# Altium PCB QSTL_25P_ZIF_ZIF.PcbDoc
Units mm, origin at the board's own origin, x right, y up, seen from the top; angles counter-clockwise.
Board outline 30 x 30 mm, 4 copper layers (Top Layer, Layer 1, Layer 2, Bottom Layer), stack 0.603 mm thick; 8 components, 54 nets, 116 pads, 331 vias.
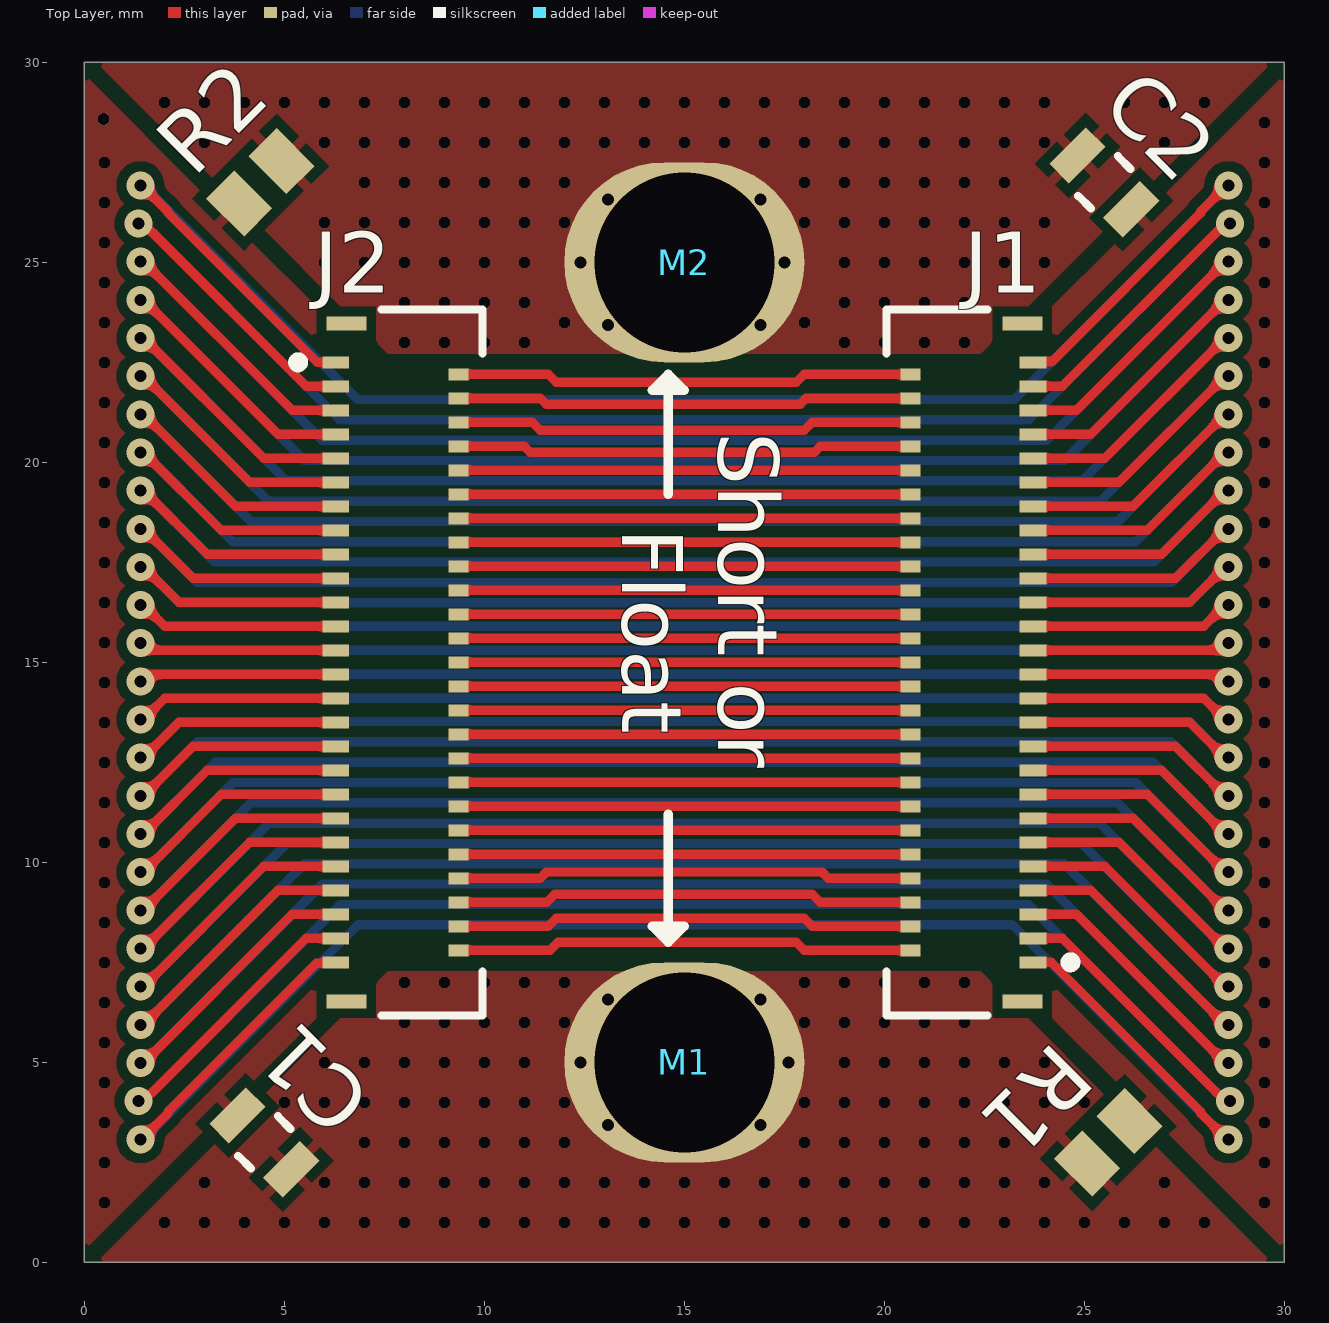
[diagram p0: Top Layer view]
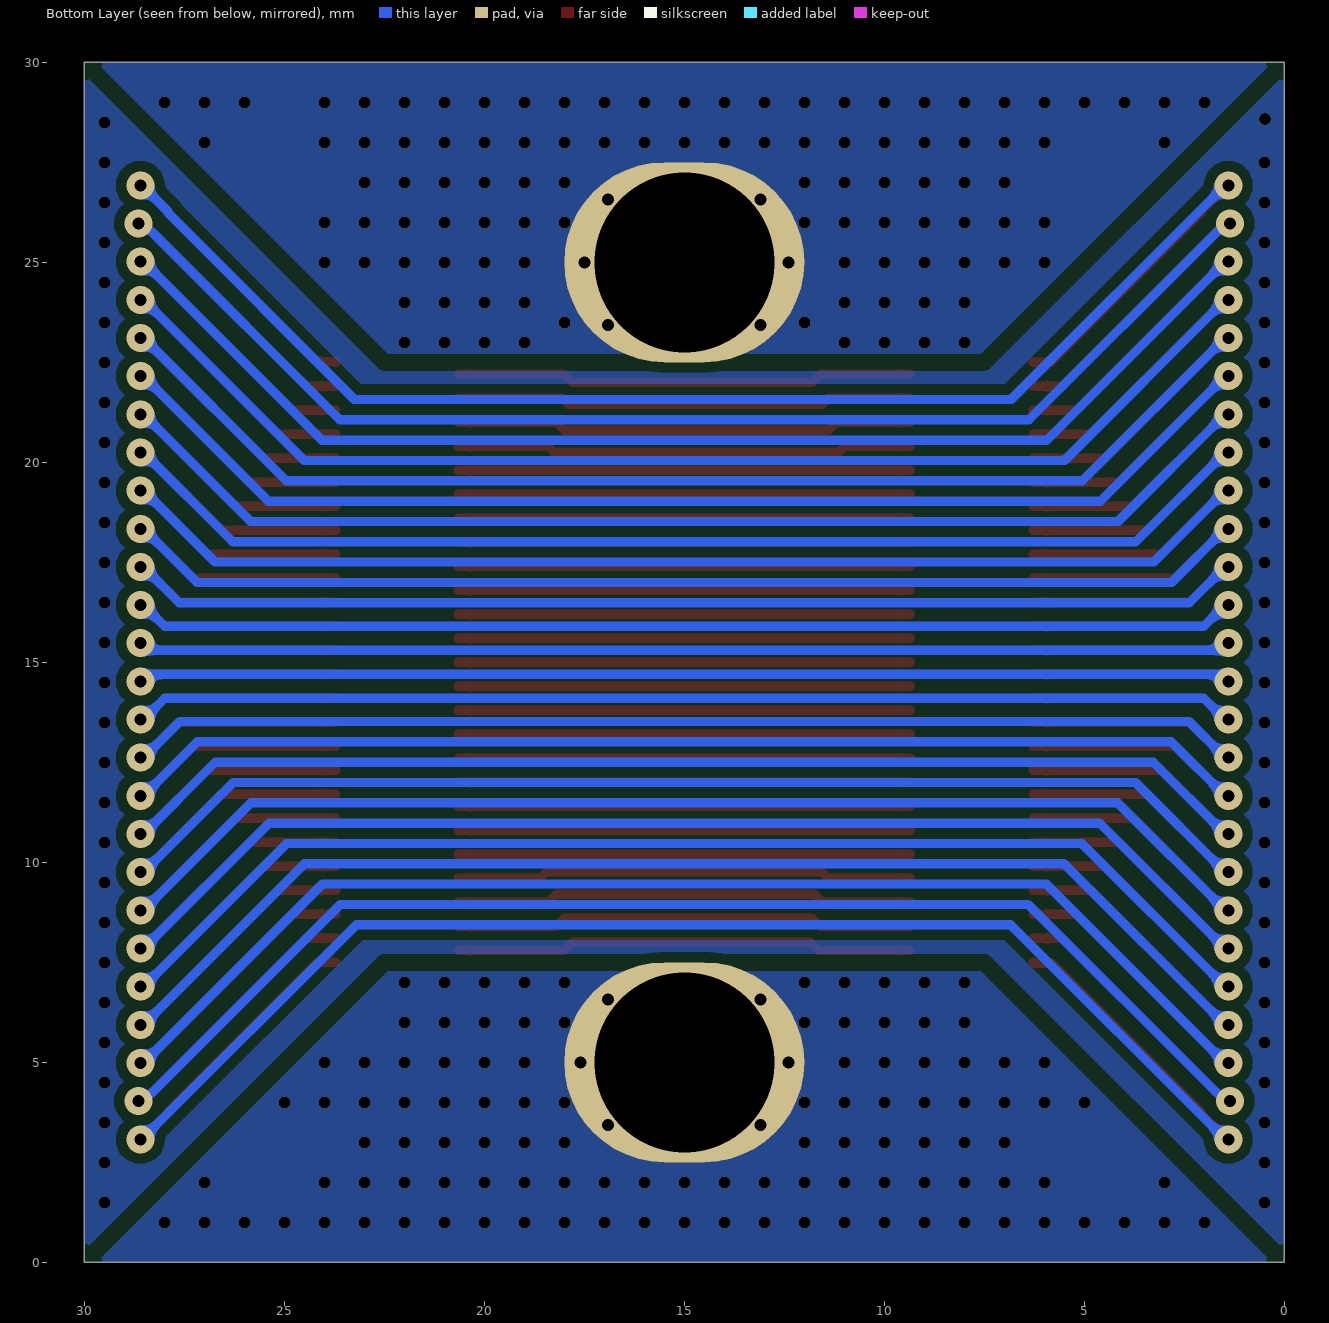
[diagram p1: Bottom Layer view, seen from below]
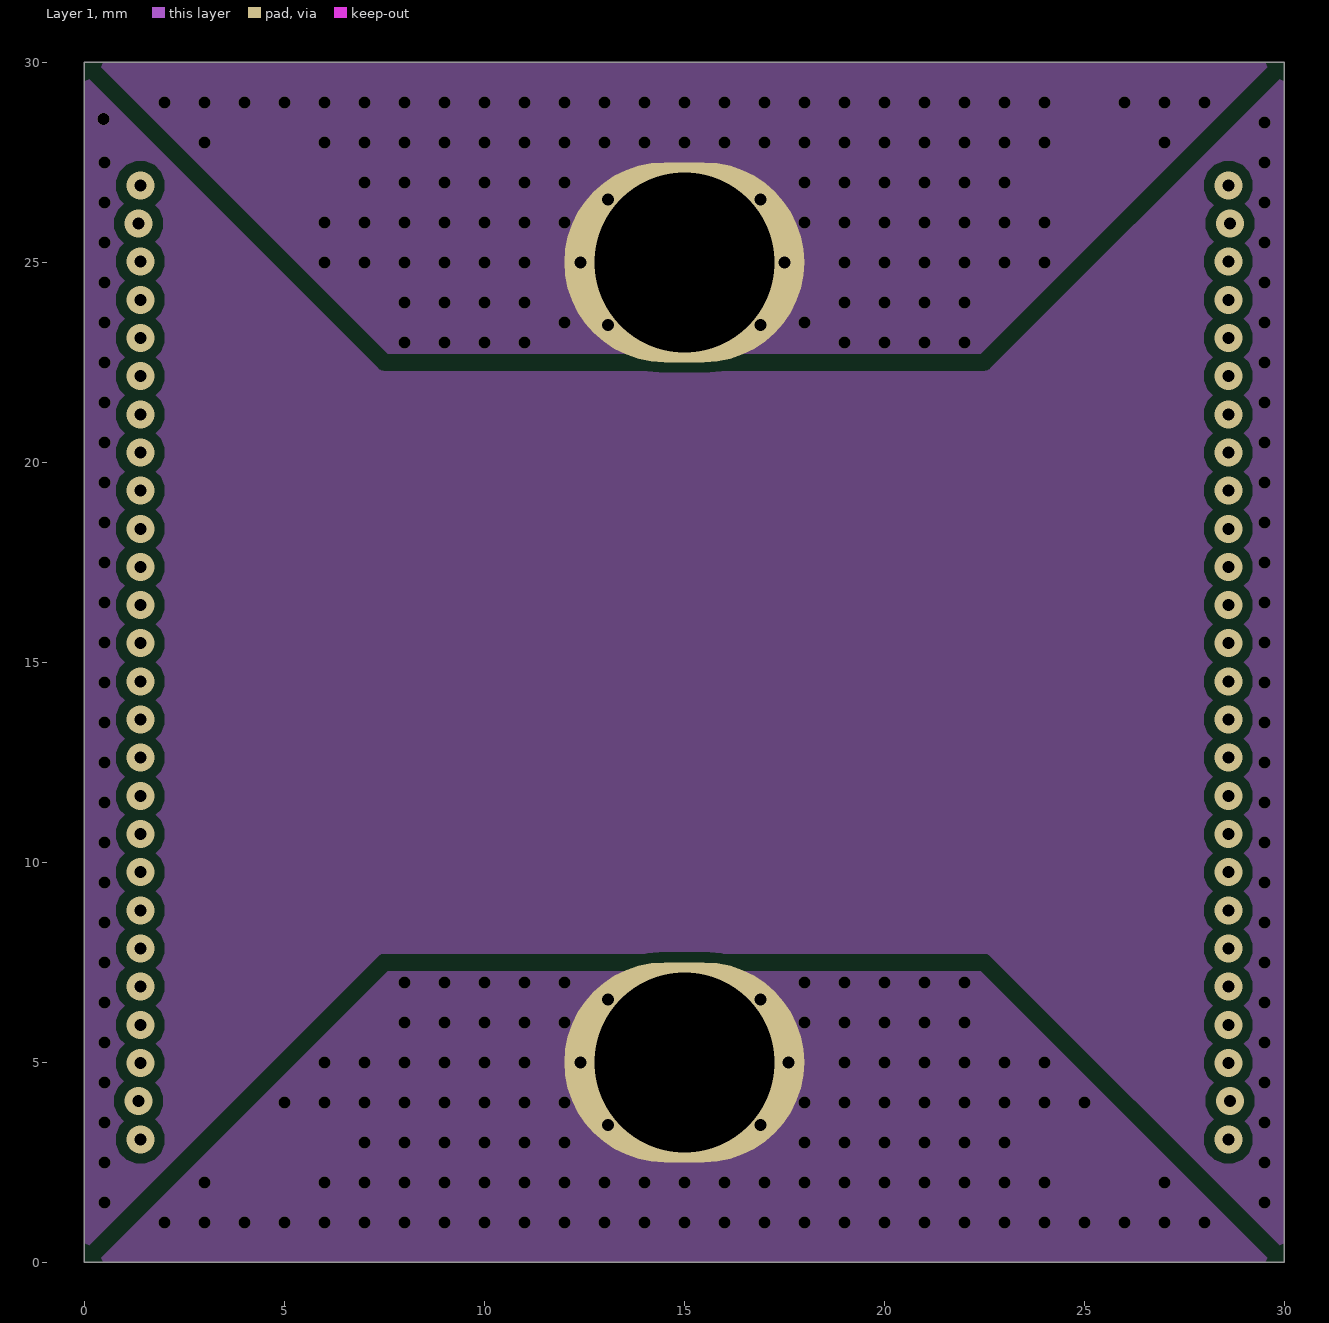
[diagram p2: Layer 1]
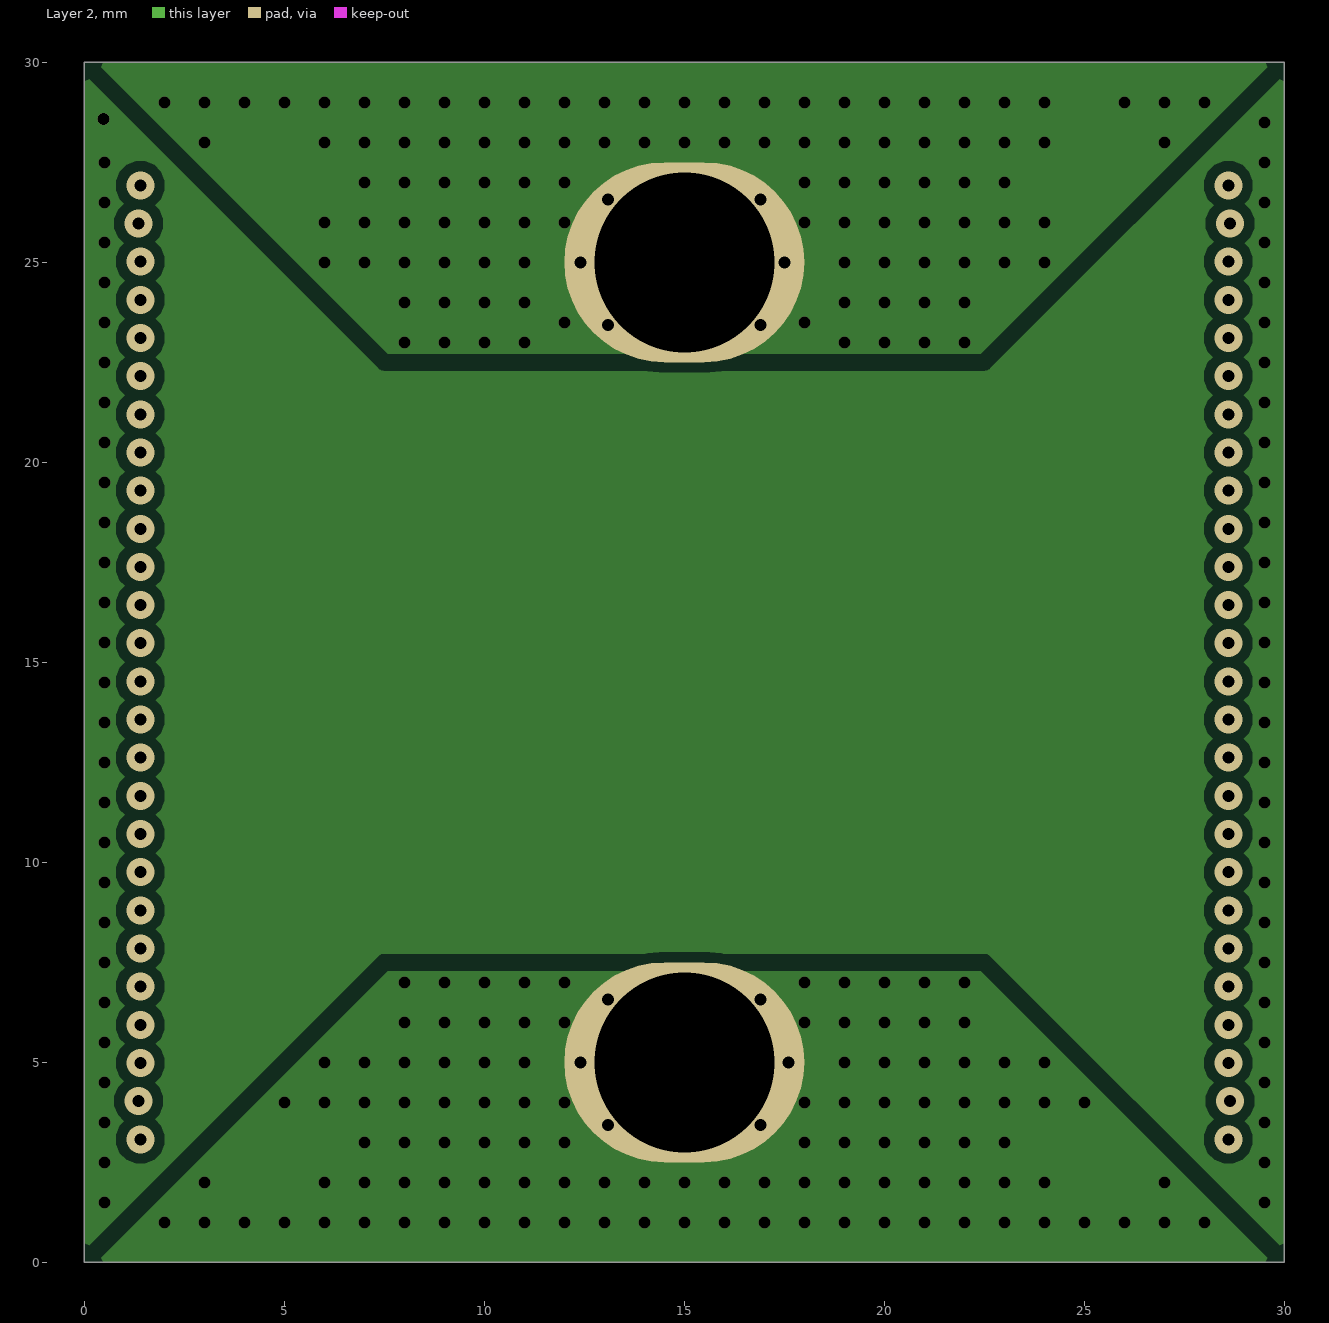
[diagram p3: Layer 2]

## Layer stack, top to bottom
Top Solder: solder mask 0.0102, Solder Resist, Dk 3.5
Top Layer: signal copper 0.0356
Dielectric 2: prepreg 0.0711, PP-006, Dk 4.1
Layer 1: signal copper 0.035
Dielectric 1: dielectric 0.32, FR-4, Dk 4.8
Layer 2: signal copper 0.035
Dielectric 3: prepreg 0.0711, PP-006, Dk 4.1
Bottom Layer: signal copper 0.0356
Bottom Solder: solder mask 0.0102, Solder Resist, Dk 3.5

## Board outline
0,0 0,30 30,30 30,0

## Design rules (kind name [scope] priority, off if disabled: settings)
Clearance [All] p1: gap=0.254 ignorepadtopadclearanceinfootprint=FALSE except(0.2: Arc-Arc Arc-Track Track-Track)
ComponentClearance [All] p1: gap=0.01 collisioncheckmode=3 verticalgap=0.254 showdistances=FALSE
PolygonConnect [All] p1: connectstyle=Relief reliefconductorwidth=0.254 reliefentries=4 polygonreliefangle="90 Angle" airgapwidth=0.254
RoutingVias [All] p1: holewidth=0.3 width=0.7 viastyle="Through Hole" minholewidth=0.3 minwidth=0.3 maxholewidth=0.3 maxwidth=1
SolderMaskExpansion [All] p1: expansion=0.102 istentingtop=FALSE
SupplyNets "Schematic Supply Nets" [InNet('GND')] p1: voltage=0.000
Width [All] p1: maxlimit=0.35 minlimit=0.156 preferedwidth=0.156 minimp=50.000000 maximp=50.000000 favimp=50.000000
29 further rules are at their usual default settings.

## Components (designator, comment, footprint, x,y, rotation, side; value= is the part's Value field where it differs from the comment)
C1 "Murata 0805" FP-GRM21B-0_15-MFG 4.5,3 r135 top
C2 "Murata 0805" FP-GRM21B-0_15-MFG 25.5,27 r315 top
J1 "5025985193" FP-5025985193-MFG 22,15 r90 top locked
J2 "5025985193" FP-5025985193-MFG 8,15 r270 top locked
M1 "M3 Connector" M3 15,5 r0 top locked
M2 "M3 Connector" M3 15,25 r0 top locked
R1 "Panasonic 0805" RESC2013X60X40LL20T25 25.6,3 r45 top
R2 "Panasonic 0805" RESC2013X60X40LL20T25 4.4,27 r225 top

## Footprints (in the part's own frame and the unit in brackets; to place one, negate y for a bottom-side part, rotate by r counter-clockwise, add the part's x,y. Pads: shape width x height; smd on the part's side, far side on the other; paste and mask are expansions set on the pad)
FP-5025985193-MFG [mm]
  rect 0.3x0.67 smd paste+0 mask+0: 1(-7.5,-1.715) 3(-6.9,-1.715) 5(-6.3,-1.715) 7(-5.7,-1.715) 9(-5.1,-1.715) 11(-4.5,-1.715) 13(-3.9,-1.715) 15(-3.3,-1.715) 17(-2.7,-1.715) 19(-2.1,-1.715) 21(-1.5,-1.715) 23(-0.9,-1.715) 25(-0.3,-1.715) 27(0.3,-1.715) 29(0.9,-1.715) 31(1.5,-1.715) 33(2.1,-1.715) 35(2.7,-1.715) 37(3.3,-1.715) 39(3.9,-1.715) 41(4.5,-1.715) 43(5.1,-1.715) 45(5.7,-1.715) 47(6.3,-1.715) 49(6.9,-1.715) 51(7.5,-1.715)
  rect 0.3x0.5 smd paste+0 mask+0: 2(-7.2,1.35) 4(-6.6,1.35) 6(-6,1.35) 8(-5.4,1.35) 10(-4.8,1.35) 12(-4.2,1.35) 14(-3.6,1.35) 16(-3,1.35) 18(-2.4,1.35) 20(-1.8,1.35) 22(-1.2,1.35) 24(-0.6,1.35) 26(0,1.35) 28(0.6,1.35) 30(1.2,1.35) 32(1.8,1.35) 34(2.4,1.35) 36(3,1.35) 38(3.6,1.35) 40(4.2,1.35) 42(4.8,1.35) 44(5.4,1.35) 46(6,1.35) 48(6.6,1.35) 50(7.2,1.35)
  rect 0.35x1 smd paste+0 mask+0: 52(-8.475,-1.45) 53(8.475,-1.45)
  silkscreen extent -8.83,-2.78 8.82,1.95
FP-GRM21B-0_15-MFG [mm]
  rect 0.7x1.3 smd paste+0 mask+0: 1(-0.95,0) 2(0.95,0)
  silkscreen extent -0.23,-0.7 0.23,0.7, body extent -1.4,-0.8 1.4,0.8, height 0.25
M3 [mm]
  oval 6x5 hole 4.5: M3(0,0)
RESC2013X60X40LL20T25 [mm] "Chip Resistor, 2-Leads, Body 2.00x1.25mm, IPC High Density"
  rect 1x1.35 smd: 1(-0.75,0) 2(0.75,0)
  body extent -1.1,-0.72 1.1,0.72, height 0.6

## Part data
C1 C2: library part CMP-2000-07555-2, "Chip Multilayer Ceramic Capacitors for General Purpose, 0805, 10uF, X7R, 15%, 10%, 10V", Capacitance=10uF, Case Code (Imperial)=0805, Case Code (Metric)=2012, Dielectric=X7R, Max Operating Temperature=125°C, Min Operating Temperature=-55°C, Package Quantity=3000, Tolerance=10%, Voltage Rating=10V, Case/Package=0805, Depth=1.25mm, Height=1.25mm, Length=2mm, Mount="Surface Mount", Packaging="Tape and Reel", REACH SVHC="No SVHC", Termination=SMD/SMT, Thickness=0.055inch, Voltage Rating (DC)=10V, Weight=0.000335oz, Width=1.25mm
J1 J2: library part CMP-1241-00093-2, "CONN FPC 51POS 0.30MM R/A", Ambient Temperature Range High=+105°C, Ambient Temperature Range Low=-40°C, Current Rating=0.3A, Manufacturer=Molex, Package=0, Temperature="-40°C to +105°C", Voltage Rating=50V, Automotive=No, Category=Conn, Ciiva Ids=8412513, ComponentLink2Description=Datasheet, ComponentLink2URL=https://www.molex.com/webdocs/datasheets/pdf/en-us/5025985193_FFC_FPC_CONNECTORS.pdf, Conn Gender=Female, Conn Orientation="Right Angle", Contact Material=Gold,Nickel, Device Class L1=Connectors, Device Class L2="FFC / FPC", Device Class L3=unset, Digikey Description="CONN FPC 51POS 0.30MM R/A", Footprint Url=https://www.molex.com/pdm_docs/sd/5025985193_sd.pdf, Height=1.83mm, Import Ts=1521860080, Is Female=yes, Lead Free=Yes, Manufacturer Part Number=5025985193, Mouser Description="FFC & FPC Connectors 0.3 FPC BackFlip Hsg RA SMT 51Ckt", Number of Contacts=51, Octopart=https://octopart.com/502598-5193-molex-33127991, Pitch=0.6mm, Release Date=1411372322, RoHS=TRUE, Temperature Range High=+105°C, Temperature Range Low=-40°C
M1 M2: library part M3
R1 R2: library part CMP-2001-00613-1, Manufacturer=Panasonic, Part Number=ERA6AEB222V

## Via types
v1: diameter 0.3, hole 0.3, Top Layer to Bottom Layer, 124 vias
v2: diameter 0.3, hole 0.3, Top Layer to Bottom Layer, tented top, 89 vias
v3: diameter 0.3, hole 0.3, Top Layer to Bottom Layer, tented both sides, 66 vias
v4: diameter 0.7, hole 0.3, Top Layer to Bottom Layer, tented both sides, 52 vias

## Nets (pads, with @x,y where several pads share a name; then routed paths per layer and width w, separated by ;. In a path a pad name is that pad's centre, name@x,y a point inside that pad or via, vN(x,y) a via of type N, cw(c..) or ccw(c..) an arc to the next point about the centre after c; other vN are vias at no path point)
GND: C1.2 C2.2 R1.2 R2.2
  other v3: 0.5,1.5 29.5,1.5 0.5,2.5 29.5,2.5 0.5,3.5 29.5,3.5 0.5,4.5 29.5,4.5 0.5,5.5 29.5,5.5 0.5,6.5 29.5,6.5 0.5,7.5 29.5,7.5 0.5,8.5 29.5,8.5 0.5,9.5 29.5,9.5 0.5,10.5 29.5,10.5 0.5,11.5 29.5,11.5 0.5,12.5 29.5,12.5 0.5,13.5 29.5,13.5 0.5,14.5 29.5,14.5 0.5,15.5 29.5,15.5 0.5,16.5 29.5,16.5 0.5,17.5 29.5,17.5 0.5,18.5 29.5,18.5 0.5,19.5 29.5,19.5 0.5,20.5 29.5,20.5 0.5,21.5 29.5,21.5 0.5,22.5 29.5,22.5 0.5,23.5 29.5,23.5 0.5,24.5 29.5,24.5 0.5,25.5 29.5,25.5 0.5,26.5 29.5,26.5 0.5,27.5 29.5,27.5 29.5,28.5 0.48,28.587
NetC1_1: C1.1 M1.M3 R1.1
  other v1: 8,1 9,1 10,1 11,1 12,1 13,1 14,1 15,1 16,1 17,1 18,1 19,1 20,1 21,1 22,1 8,2 9,2 10,2 11,2 12,2 13,2 14,2 15,2 16,2 17,2 18,2 19,2 20,2 21,2 22,2 8,3 9,3 10,3 11,3 12,3 18,3 19,3 20,3 21,3 22,3 13.094,3.436 16.906,3.436 8,4 9,4 10,4 11,4 12,4 18,4 19,4 20,4 21,4 22,4 8,5 9,5 10,5 11,5 19,5 20,5 21,5 22,5 12,6 18,6 12,7 18,7
  other v2: 2,1 3,1 4,1 5,1 6,1 7,1 23,1 24,1 25,1 26,1 27,1 28,1 3,2 6,2 7,2 23,2 24,2 27,2 7,3 23,3 5,4 6,4 7,4 23,4 24,4 25,4 6,5 7,5 23,5 24,5 8,6 9,6 10,6 11,6 19,6 20,6 21,6 22,6 8,7 9,7 10,7 11,7 19,7 20,7 21,7 22,7
  other v3: 12.4,5 17.6,5 13.094,6.564 16.906,6.564
NetC2_1: C2.1 M2.M3 R2.1
  other v1: 12,23.5 18,23.5 8,25 9,25 10,25 11,25 19,25 20,25 21,25 22,25 8,26 9,26 10,26 11,26 12,26 18,26 19,26 20,26 21,26 22,26 8,27 9,27 10,27 11,27 12,27 18,27 19,27 20,27 21,27 22,27 8,28 9,28 10,28 11,28 12,28 13,28 14,28 15,28 16,28 17,28 18,28 19,28 20,28 21,28 22,28 8,29 9,29 10,29 11,29 12,29 13,29 14,29 15,29 16,29 17,29 18,29 19,29 20,29 21,29 22,29
  other v2: 8,23 9,23 10,23 11,23 19,23 20,23 21,23 22,23 8,24 9,24 10,24 11,24 19,24 20,24 21,24 22,24 6,25 7,25 23,25 24,25 6,26 7,26 23,26 24,26 7,27 23,27 3,28 6,28 7,28 23,28 24,28 27,28 2,29 3,29 4,29 5,29 6,29 7,29 23,29 24,29 26,29 27,29 28,29
  other v3: 13.094,23.436 16.906,23.436 12.4,25 17.5,25 13.094,26.564 16.906,26.564
NetJ1_1: J1.1 J2.51 | length 45
  Top Layer w0.232: v4(1.4,3.075) 1.437,3.075 2.089,3.727 2.089,3.764 5.802,7.477 6.262,7.477 J2.51 ; J1.1 24.175,7.5 27.911,3.764 27.911,3.727 28.563,3.075 v4(28.6,3.075)
  Bottom Layer w0.232: v4@1.48,3.075 6.845,8.44 23.198,8.44 28.563,3.075 v4(28.6,3.075)
NetJ1_2: J1.2 J2.50 | length 11.5
  Top Layer w0.232: J2.50 11.642,7.8 11.842,8 17.8,8 18,7.8 J1.2
NetJ1_3: J1.3 J2.49 | length 44.6
  Top Layer w0.232: v4(1.358,4.03) 1.479,4.03 1.701,4.252 1.703,4.252 5.551,8.1 J2.49 ; J1.3 24.449,8.1 28.297,4.252 28.299,4.252 28.521,4.03 v4(28.642,4.03)
  Bottom Layer w0.232: v4(1.358,4.03) 1.479,4.03 1.701,4.252 1.703,4.252 6.399,8.948 23.601,8.948 28.297,4.252 28.299,4.252 28.521,4.03 v4(28.642,4.03)
NetJ1_4: J1.4 J2.48 | length 11.5
  Top Layer w0.232: J2.48 11.6,8.4 11.8,8.6 18,8.6 18.2,8.4 J1.4
NetJ1_5: J1.5 J2.47 | length 43.7
  Top Layer w0.232: v4(1.4,4.983) 1.48,4.983 5.197,8.7 J2.47 ; J1.5 24.803,8.7 28.52,4.983 v4(28.6,4.983)
  Bottom Layer w0.232: v4@1.48,4.983 5.953,9.456 24.047,9.456 28.52,4.983 v4(28.6,4.983)
NetJ1_6: J1.6 J2.46 | length 11.5
  Top Layer w0.232: J2.46 11.558,9 11.758,9.2 18.2,9.2 18.4,9 J1.6
NetJ1_7: J1.7 J2.45 | length 43
  Top Layer w0.232: v4(1.4,5.937) 1.48,5.937 4.843,9.3 J2.45 ; J1.7 25.157,9.3 28.52,5.937 v4(28.6,5.937)
  Bottom Layer w0.232: v4@1.48,5.937 5.507,9.964 24.493,9.964 28.52,5.937 v4(28.6,5.937)
NetJ1_8: J1.8 J2.44 | length 11.4
  Top Layer w0.232: J2.44 9.981,9.6 11.4,9.6 11.557,9.757 18.443,9.757 18.6,9.6 J1.8
NetJ1_9: J1.9 J2.43 | length 42.3
  Top Layer w0.232: v4(1.4,6.891) 1.48,6.891 4.489,9.9 J2.43 ; J1.9 25.511,9.9 28.52,6.891 v4(28.6,6.891)
  Bottom Layer w0.232: v4@1.48,6.891 5.061,10.472 24.939,10.472 28.52,6.891 v4(28.6,6.891)
NetJ1_10: J1.10 J2.42 | length 11.3
  Top Layer w0.232: J2.42 J1.10
NetJ1_11: J1.11 J2.41 | length 41.7
  Top Layer w0.232: v4(1.4,7.845) 1.48,7.845 4.135,10.5 J2.41 ; J1.11 25.865,10.5 28.52,7.845 v4(28.6,7.845)
  Bottom Layer w0.232: v4@1.48,7.845 4.615,10.98 25.385,10.98 28.52,7.845 v4(28.6,7.845)
NetJ1_12: J1.12 J2.40 | length 11.3
  Top Layer w0.232: J2.40 J1.12
NetJ1_13: J1.13 J2.39 | length 41
  Top Layer w0.232: v4(1.4,8.799) 1.48,8.799 3.781,11.1 J2.39 ; J1.13 26.219,11.1 28.52,8.799 v4(28.6,8.799)
  Bottom Layer w0.232: v4@1.48,8.799 4.169,11.488 25.831,11.488 28.52,8.799 v4(28.6,8.799)
NetJ1_14: J1.14 J2.38 | length 11.3
  Top Layer w0.232: J2.38 J1.14
NetJ1_15: J1.15 J2.37 | length 40.4
  Top Layer w0.232: v4(1.4,9.753) 1.48,9.753 3.427,11.7 J2.37 ; J1.15 26.573,11.7 28.52,9.753 v4(28.6,9.753)
  Bottom Layer w0.232: v4@1.48,9.753 3.723,11.996 26.277,11.996 28.52,9.753 v4(28.6,9.753)
NetJ1_16: J1.16 J2.36 | length 11.3
  Top Layer w0.232: J2.36 J1.16
NetJ1_17: J1.17 J2.35 | length 39.7
  Top Layer w0.232: v4(1.4,10.707) 1.48,10.707 3.073,12.3 J2.35 ; J1.17 26.927,12.3 28.52,10.707 v4(28.6,10.707)
  Bottom Layer w0.232: v4@1.48,10.707 3.277,12.504 26.723,12.504 28.52,10.707 v4(28.6,10.707)
NetJ1_18: J1.18 J2.34 | length 11.3
  Top Layer w0.232: J2.34 J1.18
NetJ1_19: J1.19 J2.33 | length 39
  Top Layer w0.232: v4(1.4,11.661) 1.48,11.661 2.719,12.9 J2.33 ; J1.19 27.281,12.9 28.52,11.661 v4(28.6,11.661)
  Bottom Layer w0.232: v4@1.48,11.661 2.831,13.012 27.169,13.012 28.52,11.661 v4(28.6,11.661)
NetJ1_20: J1.20 J2.32 | length 11.3
  Top Layer w0.232: J2.32 J1.20
NetJ1_21: J1.21 J2.31 | length 38.4
  Top Layer w0.232: v4(1.4,12.615) 1.48,12.615 2.365,13.5 J2.31 ; J1.21 27.635,13.5 28.52,12.615 v4(28.6,12.615)
  Bottom Layer w0.232: v4@1.48,12.615 2.385,13.52 27.615,13.52 28.52,12.615 v4(28.6,12.615)
NetJ1_22: J1.22 J2.30 | length 11.3
  Top Layer w0.232: J2.30 J1.22
NetJ1_23: J1.23 J2.29 | length 37.8
  Top Layer w0.232: v4(1.4,13.569) 1.48,13.569 2.011,14.1 J2.29 ; J1.23 27.989,14.1 28.52,13.569 v4(28.6,13.569)
  Bottom Layer w0.232: v4@1.48,13.569 2.011,14.1 8.285,14.1 26.789,14.1 27.989,14.1 28.52,13.569 v4(28.6,13.569)
NetJ1_24: J1.24 J2.28 | length 11.3
  Top Layer w0.232: J2.28 J1.24
NetJ1_25: J1.25 J2.27 | length 37
  Top Layer w0.232: v4(1.4,14.523) 1.577,14.7 J2.27 ; J1.25 28.423,14.7 v4(28.6,14.523)
  Bottom Layer w0.232: v4@1.577,14.7 9.21,14.7 24.483,14.7 28.423,14.7 v4(28.6,14.523)
NetJ1_26: J1.26 J2.26 | length 11.3
  Top Layer w0.232: J2.26 J1.26
NetJ1_27: J1.27 J2.25 | length 37.3
  Top Layer w0.232: v4(1.4,15.477) 1.577,15.3 J2.25 ; J1.27 28.423,15.3 v4(28.6,15.477)
  Bottom Layer w0.232: v4(1.4,15.477) 1.521,15.477 1.698,15.3 28.302,15.3 28.479,15.477 v4(28.6,15.477)
NetJ1_28: J1.28 J2.24 | length 11.3
  Top Layer w0.232: J2.24 J1.28
NetJ1_29: J1.29 J2.23 | length 43.9
  Top Layer w0.232: v4(1.4,16.431) 1.48,16.431 2.011,15.9 J2.23 ; J1.29 27.989,15.9 28.52,16.431 v4(28.6,16.431)
  Bottom Layer w0.232: v4@1.48,16.431 2.011,15.9 ; 8.106,15.9 2.011,15.9 ; v4(28.6,16.431) 28.52,16.431 27.989,15.9 24.904,15.9 2.011,15.9
NetJ1_30: J1.30 J2.22 | length 11.3
  Top Layer w0.232: J2.22 J1.30
NetJ1_31: J1.31 J2.21 | length 38.4
  Top Layer w0.232: v4(1.4,17.385) 1.48,17.385 2.365,16.5 J2.21 ; J1.31 27.635,16.5 28.52,17.385 v4(28.6,17.385)
  Bottom Layer w0.232: v4@1.48,17.385 2.375,16.49 27.625,16.49 28.52,17.385 v4(28.6,17.385)
NetJ1_32: J1.32 J2.20 | length 11.3
  Top Layer w0.232: J2.20 J1.32
NetJ1_33: J1.33 J2.19 | length 39
  Top Layer w0.232: v4(1.4,18.339) 1.48,18.339 2.719,17.1 J2.19 ; J1.33 27.281,17.1 28.52,18.339 v4(28.6,18.339)
  Bottom Layer w0.232: v4@1.48,18.339 2.821,16.998 27.179,16.998 28.52,18.339 v4(28.6,18.339)
NetJ1_34: J1.34 J2.18 | length 11.3
  Top Layer w0.232: J2.18 J1.34
NetJ1_35: J1.35 J2.17 | length 39.7
  Top Layer w0.232: v4(1.4,19.293) 1.48,19.293 3.073,17.7 J2.17 ; J1.35 26.927,17.7 28.52,19.293 v4(28.6,19.293)
  Bottom Layer w0.232: v4@1.48,19.293 3.267,17.506 26.733,17.506 28.52,19.293 v4(28.6,19.293)
NetJ1_36: J1.36 J2.16 | length 11.3
  Top Layer w0.232: J2.16 J1.36
NetJ1_37: J1.37 J2.15 | length 40.4
  Top Layer w0.232: v4(1.4,20.247) 1.48,20.247 3.427,18.3 J2.15 ; J1.37 26.573,18.3 28.52,20.247 v4(28.6,20.247)
  Bottom Layer w0.232: v4@1.48,20.247 3.713,18.014 26.287,18.014 28.52,20.247 v4(28.6,20.247)
NetJ1_38: J1.38 J2.14 | length 11.3
  Top Layer w0.232: J2.14 J1.38
NetJ1_39: J1.39 J2.13 | length 41
  Top Layer w0.232: v4(1.4,21.201) 1.48,21.201 3.781,18.9 J2.13 ; J1.39 26.219,18.9 28.52,21.201 v4(28.6,21.201)
  Bottom Layer w0.232: v4@1.48,21.201 4.159,18.522 25.841,18.522 28.52,21.201 v4(28.6,21.201)
NetJ1_40: J1.40 J2.12 | length 11.3
  Top Layer w0.232: J2.12 J1.40
NetJ1_41: J1.41 J2.11 | length 41.7
  Top Layer w0.232: v4(1.4,22.155) 1.48,22.155 4.135,19.5 J2.11 ; J1.41 25.865,19.5 28.52,22.155 v4(28.6,22.155)
  Bottom Layer w0.232: v4@1.48,22.155 4.605,19.03 25.395,19.03 28.52,22.155 v4(28.6,22.155)
NetJ1_42: J1.42 J2.10 | length 11.3
  Top Layer w0.232: J2.10 J1.42
NetJ1_43: J1.43 J2.9 | length 42.3
  Top Layer w0.232: v4(1.4,23.109) 1.48,23.109 4.489,20.1 J2.9 ; J1.43 25.511,20.1 28.52,23.109 v4(28.6,23.109)
  Bottom Layer w0.232: v4@1.48,23.109 5.051,19.538 24.949,19.538 28.52,23.109 v4(28.6,23.109)
NetJ1_44: J1.44 J2.8 | length 11.4
  Top Layer w0.232: J2.8 11,20.4 11.146,20.254 18.254,20.254 18.4,20.4 J1.44
NetJ1_45: J1.45 J2.7 | length 43
  Top Layer w0.232: v4(1.4,24.063) 1.48,24.063 4.843,20.7 J2.7 ; J1.45 25.157,20.7 28.52,24.063 v4(28.6,24.063)
  Bottom Layer w0.232: v4@1.48,24.063 5.497,20.046 24.503,20.046 28.52,24.063 v4(28.6,24.063)
NetJ1_46: J1.46 J2.6 | length 11.5
  Top Layer w0.232: J2.6 11.2,21 11.4,20.8 18,20.8 18.2,21 J1.46
NetJ1_47: J1.47 J2.5 | length 43.7
  Top Layer w0.232: v4(1.4,25.017) 1.48,25.017 5.197,21.3 J2.5 ; J1.47 24.803,21.3 28.52,25.017 v4(28.6,25.017)
  Bottom Layer w0.232: v4@1.48,25.017 5.943,20.554 24.057,20.554 28.52,25.017 v4(28.6,25.017)
NetJ1_48: J1.48 J2.4 | length 11.4
  Top Layer w0.232: J2.4 11.4,21.6 11.546,21.454 17.896,21.454 18.042,21.6 J1.48
NetJ1_49: J1.49 J2.3 | length 44.6
  Top Layer w0.232: v4(1.358,25.97) 1.479,25.97 1.701,25.748 1.703,25.748 5.551,21.9 J2.3 ; J1.49 24.449,21.9 28.297,25.748 28.299,25.748 28.521,25.97 v4(28.642,25.97)
  Bottom Layer w0.232: v4(1.358,25.97) 1.479,25.97 1.701,25.748 1.703,25.748 6.389,21.062 23.611,21.062 28.297,25.748 28.299,25.748 28.521,25.97 v4(28.642,25.97)
NetJ1_50: J1.50 J2.2 | length 11.5
  Top Layer w0.232: J2.2 11.6,22.2 11.8,22 17.8,22 18,22.2 J1.50
NetJ1_51: J1.51 J2.1 | length 45.1
  Top Layer w0.232: v4(1.4,26.925) 1.437,26.925 2.089,26.273 2.089,26.236 5.825,22.5 J2.1 ; J1.51 23.738,22.523 24.198,22.523 27.911,26.236 27.911,26.273 28.563,26.925 v4(28.6,26.925)
  Bottom Layer w0.232: v4(1.4,26.925) 1.48,26.925 6.835,21.57 23.245,21.57 27.911,26.236 27.911,26.273 28.563,26.925 v4(28.6,26.925)
pads on no net: J1.52 J1.53 J2.52 J2.53

## Polygon pours and split planes (outlines as drawn)
NetC1_1 on Layer 1 "GND_L01_P-001" (solid, pour order 20): 0.308,0 29.692,0 22.41,7.282 7.59,7.282
NetC2_1 on Layer 1 "GND_L01_P-001" (solid, pour order 19): 0.308,30 29.692,30 22.41,22.718 7.59,22.718
GND on Layer 1 "GND_L01_P-001" (solid, pour order 18): 0,0.308 7.346,7.654 cw(c7.5,7.5) 7.5,7.718 22.5,7.718 cw(c22.5,7.5) 22.654,7.654 30,0.308 30,29.692 22.654,22.346 cw(c22.5,22.5) 22.5,22.282 7.5,22.282 cw(c7.5,22.5) 7.346,22.346 0,29.692
NetC1_1 on Top Layer "GND_L01_P-001" (solid, pour order 14): 0.308,0 29.692,0 22.41,7.282 7.59,7.282
NetC2_1 on Top Layer "GND_L01_P-001" (solid, pour order 12): 0.308,30 29.692,30 22.41,22.718 7.59,22.718
GND on Top Layer "GND_L01_P-001" (solid, remove dead copper, pour order 13): 0,0.308 7.346,7.654 cw(c7.5,7.5) 7.5,7.718 22.5,7.718 cw(c22.5,7.5) 22.654,7.654 30,0.308 30,29.692 22.654,22.346 cw(c22.5,22.5) 22.5,22.282 7.5,22.282 cw(c7.5,22.5) 7.346,22.346 0,29.692
GND on Bottom Layer "GND_L01_P-001" (solid, pour order 15): 0,0.308 7.346,7.654 cw(c7.5,7.5) 7.5,7.718 22.5,7.718 cw(c22.5,7.5) 22.654,7.654 30,0.308 30,29.692 22.654,22.346 cw(c22.5,22.5) 22.5,22.282 7.5,22.282 cw(c7.5,22.5) 7.346,22.346 0,29.692
NetC2_1 on Bottom Layer "GND_L01_P-001" (solid, pour order 17): 0.308,30 29.692,30 22.41,22.718 7.59,22.718
NetC1_1 on Bottom Layer "GND_L01_P-001" (solid, pour order 16): 0.308,0 29.692,0 22.41,7.282 7.59,7.282
no net on Bottom Solder "NONET_L03_P-001" (solid): 0,30 7.5,22.5 22.5,22.5 30,30
no net on Bottom Solder "NONET_L03_P-001" (solid): 0,0 7.5,7.5 22.5,7.5 30,0
NetC2_1 on Layer 2 "GND_L01_P-001" (solid, pour order 23): 0.308,30 29.692,30 22.41,22.718 7.59,22.718
NetC1_1 on Layer 2 "GND_L01_P-001" (solid, pour order 22): 0.308,0 29.692,0 22.41,7.282 7.59,7.282
GND on Layer 2 "GND_L01_P-001" (solid, pour order 21): 0,0.308 0,29.692 7.346,22.346 ccw(c7.5,22.5) 7.5,22.282 22.5,22.282 ccw(c22.5,22.5) 22.654,22.346 30,29.692 30,0.308 22.654,7.654 ccw(c22.5,7.5) 22.5,7.718 7.5,7.718 ccw(c7.5,7.5) 7.346,7.654
no net on Top Solder "NONET_L03_P-001" (solid): 30,4 26,8 26,22 30,26
no net on Top Solder "NONET_L03_P-001" (solid): 0,4 4,8 4,22 0,26
no net on Top Solder "NONET_L03_P-001" (solid): 11.5,23 11.5,7.5 18.5,7.5 18.5,23
no net on Top Solder "NONET_L03_P-001" (solid): 7.5,0 7.5,5.5 11.5,5.5 11.5,7.5 18.5,7.5 18.5,5.5 22.5,5.5 22.5,0
no net on Top Solder "NONET_L03_P-001" (solid): 7.5,30 7.5,24.5 11.5,24.5 11.5,23 18.5,23 18.5,24.5 22.5,24.5 22.5,30

## Silkscreen, mask and mechanical layers (free items; w line width, h text height)
Top Overlay:
  lines w0.232: 14.6,11.2 14.6,8 ; 14.6,19.2 14.6,22.2 ; 14.6,8 14.2,8.4 15,8.4 14.6,8 ; 14.6,22.2 14.2,21.8 15,21.8 14.6,22.2
  text "Short or" at 15.854,20.746 h1.52 r270
  text "Float" at 13.454,18.346 h1.52 r270
Mechanical 1:
  the board outline again, w0.3